# Altium PCB SAMV71_tito_shield.PcbDoc
Units mm, origin at the board's own origin, x right, y up, seen from the top; angles counter-clockwise.
Board outline 90.68 x 135.25 mm, 2 copper layers (Top Layer, Bottom Layer), stack 0.325 mm thick; 11 components, 82 nets, 100 pads, 1 vias.
Unrouted connection lines stored in the file: 14.
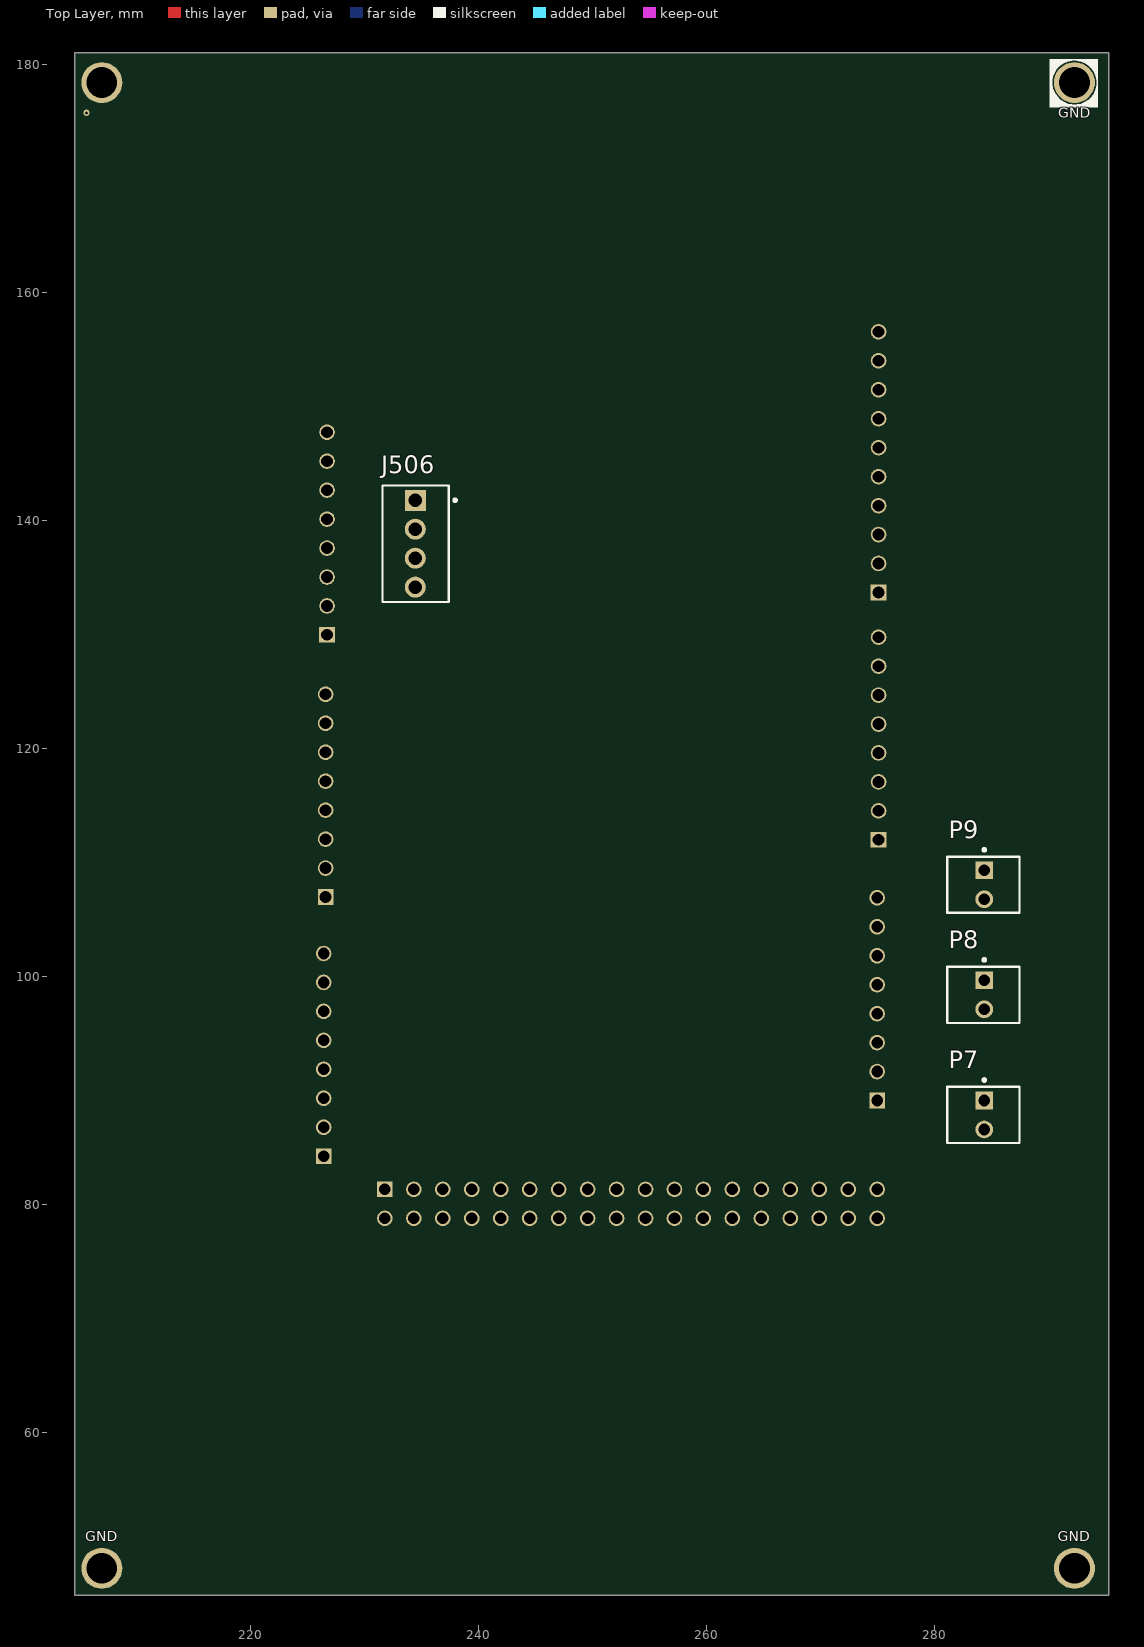
[diagram p0: Top Layer view]
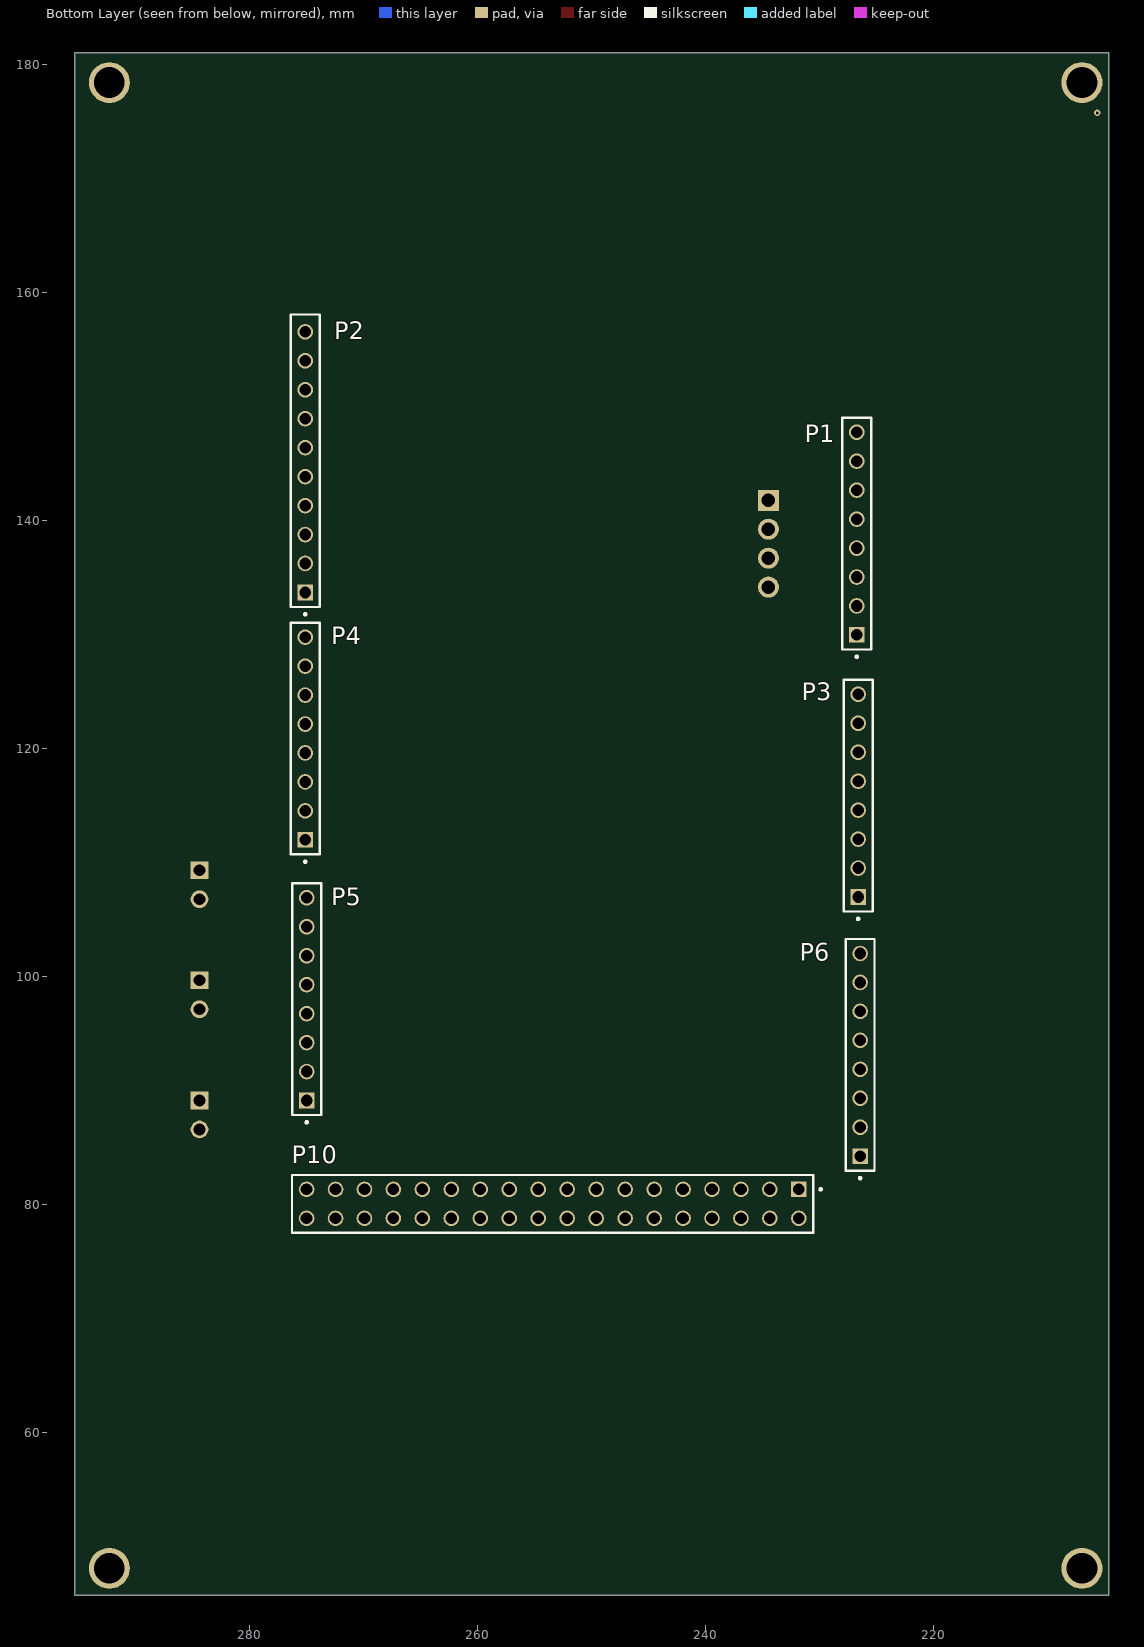
[diagram p1: Bottom Layer view, seen from below]

## Layer stack, top to bottom
Top Solder: solder mask 0.0102, Solder Resist, Dk 3.5
Top Layer: signal copper 0.0356
Dielectric 1: core 0.254, FR-4, Dk 4.2
Bottom Layer: signal copper 0.0356
Bottom Solder: solder mask 0.0102, Solder Resist, Dk 3.5

## Board outline
204.597,45.72 295.275,45.72 295.275,180.975 204.597,180.975

## Design rules (kind name [scope] priority, off if disabled: settings)
Clearance [All] p1: gap=0.254 ignorepadtopadclearanceinfootprint=FALSE except(0: Arc-Hole Track-Hole SMDPad-Hole THPad-Hole Via-Hole Fill-Hole Poly-Hole Region-Hole Text-Hole)
PolygonConnect [All] p1: connectstyle=Relief reliefconductorwidth=0.254 reliefentries=4 polygonreliefangle="90 Angle" airgapwidth=0.254
RoutingVias [All] p1: holewidth=0.711 width=1.27 viastyle="Through Hole" minholewidth=0.711 minwidth=1.27 maxholewidth=0.711 maxwidth=1.27
SolderMaskExpansion [All] p1: expansion=0.102
Width [All] p1: maxlimit=0.254 minlimit=0.254 preferedwidth=0.254
30 further rules are at their usual default settings.

## Components (designator, comment, footprint, x,y, rotation, side; value= is the part's Value field where it differs from the comment)
J506 "" Molex_22-27-2041_0 234.473,137.931 r90 top
P1 "J501 Power" SAMTEC_TSW-108-07-G-S 226.706,138.82 r90 bottom
P2 "J500 Digital High" PCBComponent_1 271.521,129.972 r90 bottom
P3 "J502 Analog Low" SAMTEC_TSW-108-07-G-S 226.579,115.833 r90 bottom
P4 "J503 Digital Low" SAMTEC_TSW-108-07-G-S 275.077,120.846 r90 bottom
P5 "J504 Analog High" SAMTEC_TSW-108-07-G-S 274.95,97.986 r90 bottom
P6 "J505 Communication" SAMTEC_TSW-108-07-G-S 226.41,93.1 r90 bottom
P7 "Motor drivers" MOLX-22-23-2021_V 284.348,87.826 r270 top
P8 "WiFi" MOLX-22-23-2021_V 284.348,98.367 r270 top
P9 "OBC" MOLX-22-23-2021_V 284.348,108.019 r270 top
P10 "J507 Digital Extra" SAMTEC_TSW-118-07-G-D 253.37,80.03 r0 bottom

## Footprints (in the part's own frame and the unit in brackets; to place one, negate y for a bottom-side part, rotate by r counter-clockwise, add the part's x,y. Pads: shape width x height; smd on the part's side, far side on the other; paste and mask are expansions set on the pad)
Molex_22-27-2041_0 [mm]
  rect 1.84x1.84 hole 1.19 paste-1000 mask+0: 1(3.81,0.02)
  round 1.84 hole 1.19 paste-1000 mask+0: 2(1.27,0.02) 3(-1.27,0.02) 4(-3.81,0.02)
  silkscreen extent -5.11,-3.6 5.11,2.9, body extent -5.31,-3.18 5.31,3.18, height 0.25
MOLX-22-23-2021_V [mm] "THD, 2-Leads, Body 6.35x4.93mm, Pitch 2.54mm"
  rect 1.55x1.55 hole 1.02: 1(-1.27,0)
  round 1.55 hole 1.02: 2(1.27,0)
  silkscreen extent -3.19,-3.25 2.46,3.1, body extent -2.46,-3.25 2.46,3.1, height 10.66
PCBComponent_1 [mm]
  rect 1.37x1.37 hole 1.02: 01(3.683,3.556)
  round 1.37 hole 1.02: 02(6.223,3.556) 03(8.763,3.556) 04(11.303,3.556) 05(13.843,3.556) 06(16.383,3.556) 07(18.923,3.556) 08(21.463,3.556) 09(24.003,3.556) 10(26.543,3.556)
  silkscreen extent 1.66,2.29 28.07,4.83, body extent 2.41,2.29 27.94,4.83, height 8.38
SAMTEC_TSW-108-07-G-S [mm]
  rect 1.37x1.37 hole 1.02: 01(-8.89,0)
  round 1.37 hole 1.02: 02(-6.35,0) 03(-3.81,0) 04(-1.27,0) 05(1.27,0) 06(3.81,0) 07(6.35,0) 08(8.89,0)
  silkscreen extent -10.91,-1.27 10.16,1.27, body extent -10.16,-1.27 10.29,1.27, height 8.38
SAMTEC_TSW-118-07-G-D [mm]
  rect 1.37x1.37 hole 1.02: 01(-21.59,-1.27)
  round 1.37 hole 1.02: 02(-21.59,1.27) 03(-19.05,-1.27) 04(-19.05,1.27) 05(-16.51,-1.27) 06(-16.51,1.27) 07(-13.97,-1.27) 08(-13.97,1.27) 09(-11.43,-1.27) 10(-11.43,1.27) 11(-8.89,-1.27) 12(-8.89,1.27) 13(-6.35,-1.27) 14(-6.35,1.27) 15(-3.81,-1.27) 16(-3.81,1.27) 17(-1.27,-1.27) 18(-1.27,1.27) 19(1.27,-1.27) 20(1.27,1.27) 21(3.81,-1.27) 22(3.81,1.27) 23(6.35,-1.27) 24(6.35,1.27) 25(8.89,-1.27) 26(8.89,1.27) 27(11.43,-1.27) 28(11.43,1.27) 29(13.97,-1.27) 30(13.97,1.27) 31(16.51,-1.27) 32(16.51,1.27) 33(19.05,-1.27) 34(19.05,1.27) 35(21.59,-1.27) 36(21.59,1.27)
  silkscreen extent -23.61,-2.54 22.86,2.54, body extent -22.99,-2.54 22.73,2.54, height 8.38

## Part data
J506: library part 22-27-2041
P1 P3 P4 P5 P6: library part TSW-108-07-G-S, Package=None, Availability=Unavailable, MF=Samtec, MP=TSW-108-07-G-S, Price=None
P2: library part Component_1
P7 P8 P9: library part 22-23-2021, "Male Header, Pitch 2.54 mm, 1 x 2 Position, Height 10.67 mm, Tail Length 3.56 mm, 0 to 75 degC, RoHS, Bulk", Maximum service temperature=75C, Minimum service temperature=0C, Rated current=4/ContactA, Rated Voltage=250V, ComponentLink1Description="Manufacturer URL", ComponentLink1URL=http://www.molex.com/, ComponentLink2Description=Datasheet, ComponentLink2URL=https://datasheet.ciiva.com/19454/232266-19454304.pdf, Contact point finish="Tin Over Copper", Height=10.67mm, Length=5.08mm, Mounting Technology="Through Hole", Number of arrays=1, Number of poles=2, PackageDescription="Male Header, Pitch 2.54 mm, 1 x 2 Position, Height 10.67 mm, Tail Length 3.56 mm", PartNumber=22-23-2021, Pitch=2.54mm, Series name=6373, Shape/Type=Straight, Width=6.35mm, Wire connection method=Solder
P10: library part TSW-118-07-G-D, Package=None, Availability=Unavailable, MF="Samtec Inc.", MP=TSW-118-07-G-D, Price=None

## Free pads (board coordinates)
  round 3.6 hole 2.7 paste-2.6: 666(206.957,48.07) 666(206.957,178.37) 666(292.257,48.07) 666(292.257,178.37)

## Via types
v1: diameter 0.55, hole 0.25, Top Layer to Bottom Layer, tented both sides, 1 vias

## Nets (pads, with @x,y where several pads share a name; then routed paths per layer and width w, separated by ;. In a path a pad name is that pad's centre, name@x,y a point inside that pad or via, vN(x,y) a via of type N, cw(c..) or ccw(c..) an arc to the next point about the centre after c; other vN are vias at no path point)
+3.3: J506.3 P1.04
+5: P1.05
GND: J506.4 P1.06 P1.07
NetJ506_1: J506.1 P6.07
NetJ506_2: J506.2 P6.08
NetP1_01: P1.01
NetP1_02: P1.02
NetP1_03: P1.03
NetP1_08: P1.08
NetP2_01: P2.01
NetP2_02: P2.02
NetP2_03: P2.03
NetP2_04: P2.04 P10.35 P10.36
NetP2_05: P2.05
NetP2_06: P2.06
NetP2_07: P2.07
NetP2_08: P2.08
NetP2_09: P2.09
NetP2_10: P2.10
NetP3_01: P3.01
NetP3_02: P3.02
NetP3_03: P3.03
NetP3_04: P3.04
NetP3_05: P3.05
NetP3_06: P3.06
NetP3_07: P3.07
NetP3_08: P3.08
NetP4_01: P4.01
NetP4_02: P4.02
NetP4_03: P4.03
NetP4_04: P4.04
NetP4_05: P4.05
NetP4_06: P4.06
NetP4_07: P4.07
NetP4_08: P4.08
NetP5_01: P5.01
NetP5_02: P5.02
NetP5_03: P5.03
NetP5_04: P5.04
NetP5_05: P5.05
NetP5_06: P5.06
NetP5_07: P5.07 P7.1
NetP5_08: P5.08 P7.2
NetP6_01: P6.01
NetP6_02: P6.02
NetP6_03: P6.03 P9.1
NetP6_04: P6.04 P9.2
NetP6_05: P6.05 P8.1
NetP6_06: P6.06 P8.2
NetP10_01: P10.01 P10.02
NetP10_03: P10.03
NetP10_04: P10.04
NetP10_05: P10.05
NetP10_06: P10.06
NetP10_07: P10.07
NetP10_08: P10.08
NetP10_09: P10.09
NetP10_10: P10.10
NetP10_11: P10.11
NetP10_12: P10.12
NetP10_13: P10.13
NetP10_14: P10.14
NetP10_15: P10.15
NetP10_16: P10.16
NetP10_17: P10.17
NetP10_18: P10.18
NetP10_19: P10.19
NetP10_20: P10.20
NetP10_21: P10.21
NetP10_22: P10.22
NetP10_23: P10.23
NetP10_24: P10.24
NetP10_25: P10.25
NetP10_26: P10.26
NetP10_27: P10.27
NetP10_28: P10.28
NetP10_29: P10.29
NetP10_30: P10.30
NetP10_31: P10.31
NetP10_32: P10.32
NetP10_33: P10.33
NetP10_34: P10.34
copper on no net:
  other v1: 205.607,175.72

## Polygon pours and split planes (outlines as drawn)
no net on Top Overlay "MountingHole_Index" (solid): 290.107,180.42 294.307,180.42 294.307,176.22 290.107,176.22

## Silkscreen, mask and mechanical layers (free items; w line width, h text height)
Top Overlay:
  pour cut-out: 290.347,178.38 ccw(c292.267,178.38) 292.267,176.46 ccw(c292.267,178.36) 294.167,178.36 ccw(c292.247,178.36) 292.247,180.28 ccw(c292.247,178.38)
  text "GND" at 290.857,174.97 h1.52
  text "GND" at 205.507,50.12 h1.52
  text "GND" at 290.807,50.12 h1.52
Mechanical 5:
  circle w0.2: c292.257,178.37 r1.35
Mechanical 6:
  circle w0.254: c206.957,178.37 r1.35
  circle w0.254: c292.257,178.37 r1.35
  circle w0.254: c292.257,48.07 r1.35
  circle w0.254: c206.957,48.07 r1.35
Mechanical 7:
  circle w0.2: c292.257,48.07 r1.35
  circle w0.2: c206.957,178.37 r1.35
  circle w0.2: c292.257,178.37 r1.35
  circle w0.2: c206.957,48.07 r1.35
Mechanical 9:
  circle w0.5: c292.256,48.07 r1.5
  circle w0.5: c292.256,178.37 r1.5
  circle w0.5: c206.956,48.07 r1.5
  circle w0.5: c206.956,178.37 r1.5
Mechanical 10:
  circle w0.5: c292.257,48.07 r1.5
  circle w0.5: c206.956,48.07 r1.5
  circle w0.5: c206.956,178.37 r1.5
  circle w0.5: c206.956,178.37 r2.5
  circle w0.5: c206.956,48.07 r2.5
  circle w0.5: c292.257,48.07 r2.5
  circle w0.5: c292.257,178.37 r2.5
  circle w0.5: c292.257,178.37 r1.5
Mechanical 12:
  circle w0.2: c292.257,48.07 r1.35